# Altium PCB PCB1.PcbDoc
Units mil, origin at the board's own origin, x right, y up, seen from the top; angles counter-clockwise.
Board outline 4800 x 2800 mil, 2 copper layers (Top Layer, Bottom Layer); 12 components, 75 nets, 69 pads, 16 vias.
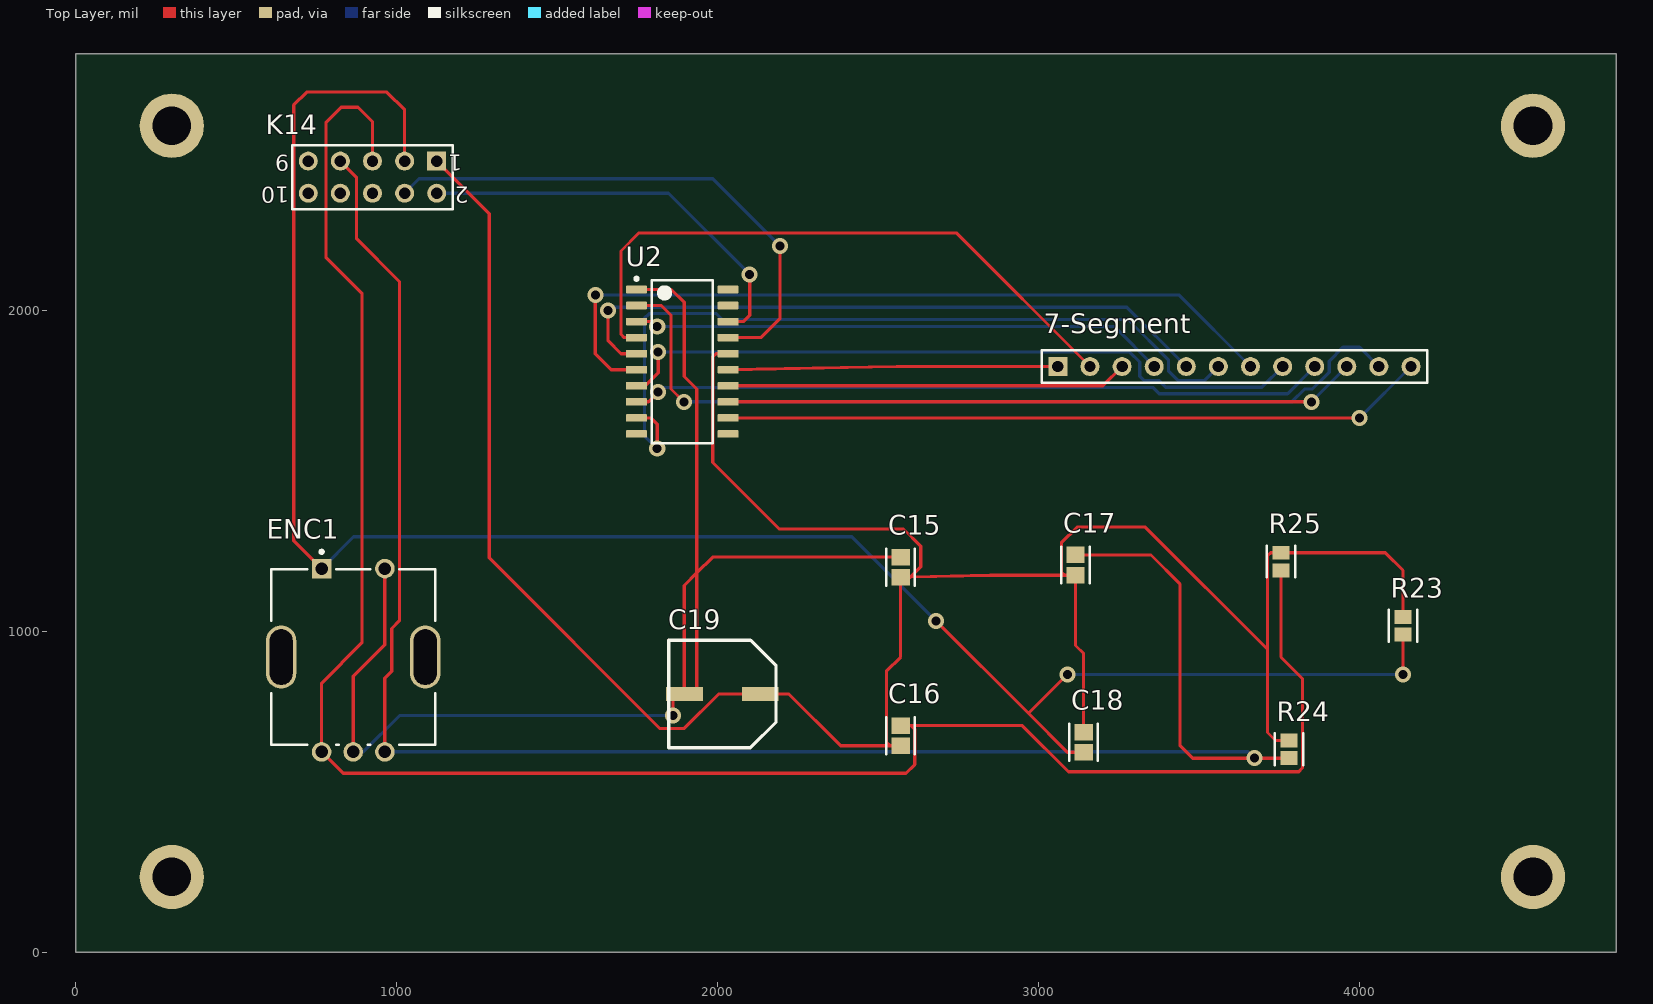
[diagram p0: Top Layer view]
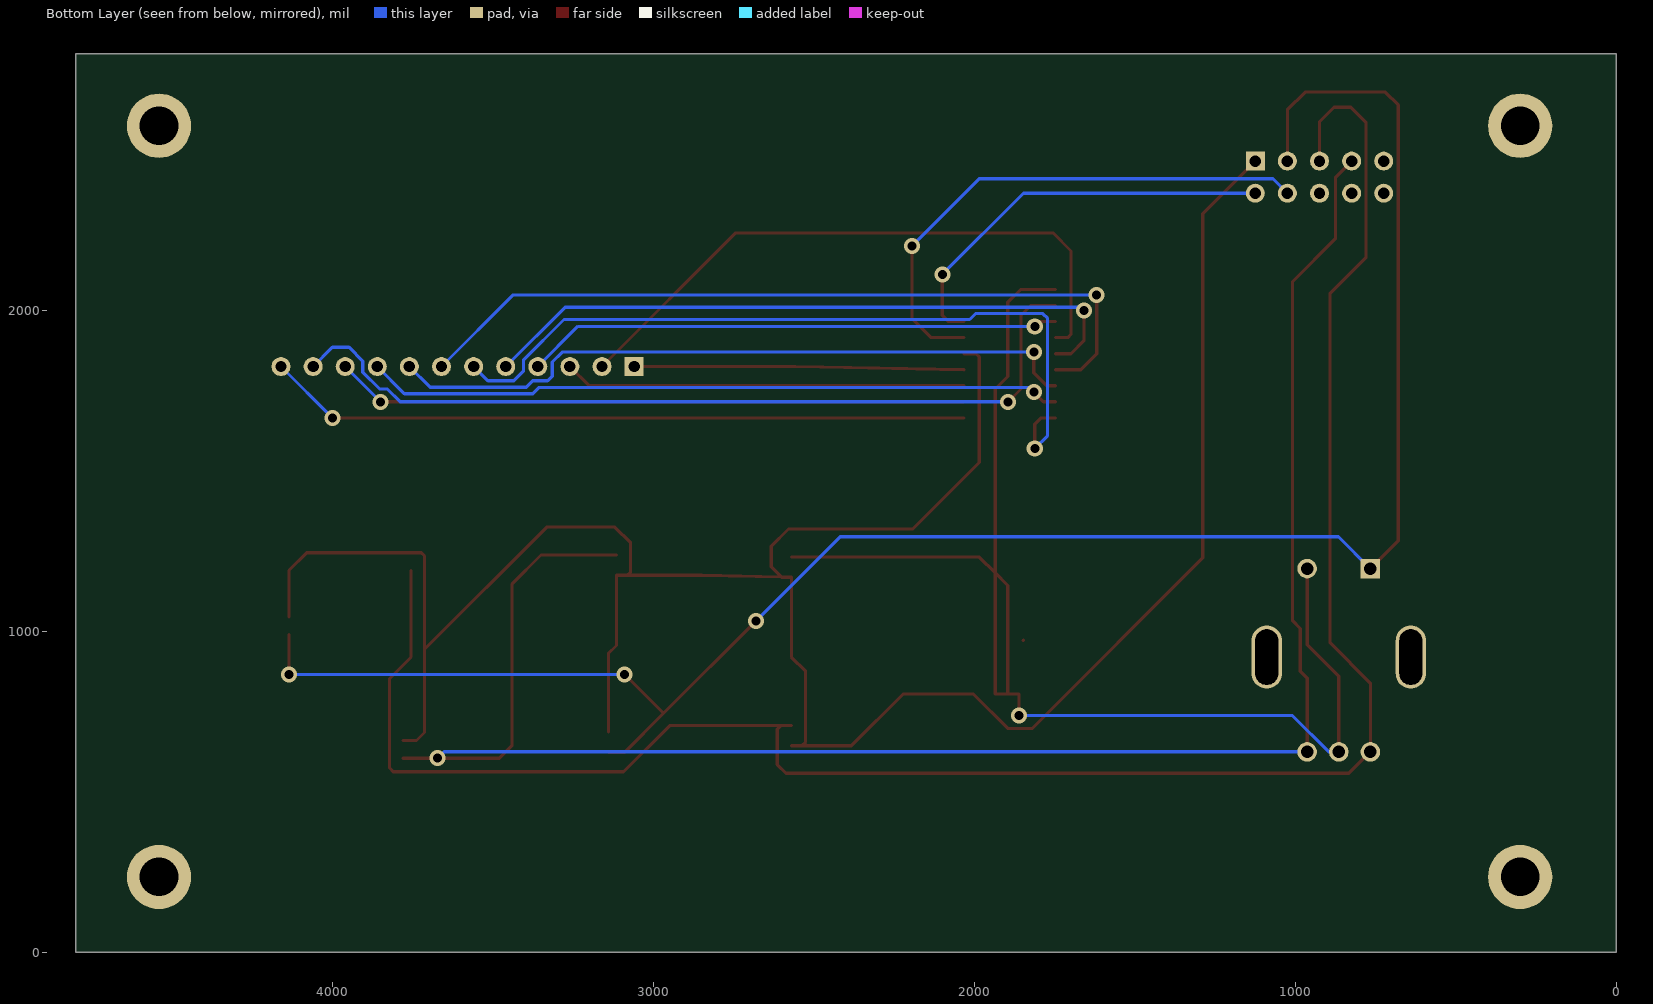
[diagram p1: Bottom Layer view, seen from below]
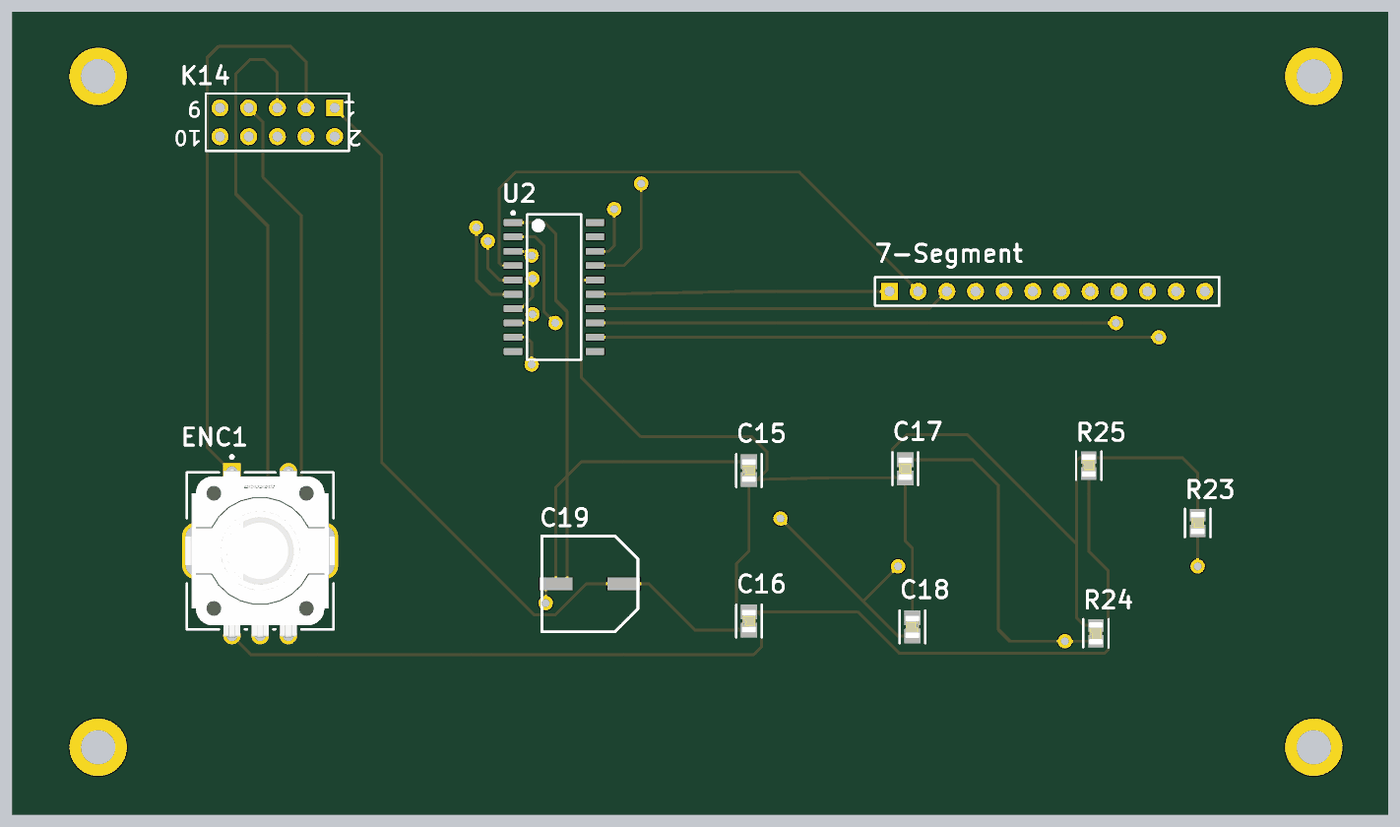
[diagram p2: 3D render of the assembled board from above, using the file's embedded part models]

## Layer stack, top to bottom
Top Solder: solder mask 0.4, Solder Resist, Dk 3.5
Top Layer: signal copper 1.4
Dielectric 1: dielectric 12.6, FR-4, Dk 4.8
Bottom Layer: signal copper 1.4
Bottom Solder: solder mask 0.4, Solder Resist, Dk 3.5

## Board outline
0,0 4800,0 4800,2800 0,2800

## Design rules (kind name [scope] priority, off if disabled: settings)
Clearance [All] p1: gap=10 ignorepadtopadclearanceinfootprint=FALSE
PolygonConnect [All] p1: connectstyle=Relief reliefconductorwidth=10 reliefentries=4 polygonreliefangle="90 Angle" airgapwidth=10
RoutingVias [All] p1: holewidth=28 width=50 viastyle="Through Hole" minholewidth=28 minwidth=50 maxholewidth=28 maxwidth=50
SolderMaskExpansion [All] p1: expansion=4 istentingtop=FALSE
Width [All] p1: maxlimit=10 minlimit=10 preferedwidth=10
30 further rules are at their usual default settings.

## Components (designator, comment, footprint, x,y, rotation, side; value= is the part's Value field where it differs from the comment)
7-Segment "header" HDR1X12 3060,1825 r0 top
C15 "100 nf" CC_0805_L 2570,1200 r90 top value="0.22 μF"
C16 "10 nf" CC_0805_L 2570,675 r90 top value="0.22 μF"
C17 "10 nf" CC_0805_L 3115,1206.53 r90 top value="0.22 μF"
C18 "10 nf" CC_0805_L 3140,655 r270 top value="0.22 μF"
C19 "100 uf" CE_D8_L10 2015,805 r0 top
ENC1 "" PEC11R_4220F_S0012 865,920 r0 top
K14 "Header 5X2" HDR2X5 1125,2465 r180 top
R23 "10k" CC_0805_m 4135,1017.41 r90 top
R24 "10k" CC_0805_m 3780,632.59 r90 top
R25 "10k" CC_0805_m 3755,1217.41 r90 top
U2 "TM1637" SOP_20_M 1890,1840 r0 top

## Footprints (in the part's own frame and the unit in brackets; to place one, negate y for a bottom-side part, rotate by r counter-clockwise, add the part's x,y. Pads: shape width x height; smd on the part's side, far side on the other; paste and mask are expansions set on the pad)
CC_0805_L [mil]
  rect 51.36x57.33 smd paste+0 mask+0: 1(-31.53,0) 2(31.53,0)
  silkscreen extent -57,-44 57,44, body extent -67,-39 67,39, height 10
CC_0805_m [mil]
  rect 43.49x53.39 smd paste+0 mask+0: 1(-27.59,0) 2(27.59,0)
  silkscreen extent -49,-44 49,44, body extent -53,-32 53,32, height 10
CE_D8_L10 [mm]
  rect 2.9x1.1 smd: 1(-3,0) 2(3,0)
  Top Layer lines w0.254: -4.259,4.25 -4.25,4.241
  silkscreen extent -4.26,-4.25 4.25,4.25
HDR1X12 [mm] "Connector; Header; 12 Position"
  rect 1.5x1.5 hole 0.9: 1(0,0)
  round 1.5 hole 0.9: 2(2.54,0) 3(5.08,0) 4(7.62,0) 5(10.16,0) 6(12.7,0) 7(15.24,0) 8(17.78,0) 9(20.32,0) 10(22.86,0) 11(25.4,0) 12(27.94,0)
  silkscreen extent -1.27,-1.27 29.21,1.27
HDR2X5 [mm] "Connector; Header; 5x2 Position"
  rect 1.5x1.5 hole 0.9: 1(0,0)
  round 1.5 hole 0.9: 2(0,2.54) 3(2.54,0) 4(2.54,2.54) 5(5.08,0) 6(5.08,2.54) 7(7.62,0) 8(7.62,2.54) 9(10.16,0) 10(10.16,2.54)
  silkscreen extent -1.27,-1.27 11.43,3.81
PEC11R_4220F_S0012 [mm]
  rect 1.55x1.55 hole 1 paste-1000 mask+0: 1(-2.5,7)
  round 1.55 hole 1 paste-1000 mask+0: 2(2.5,7) A(-2.5,-7.5) B(2.5,-7.5) C(0,-7.5)
  rrect100% 2.4x5 hole 4.4 slot 1.8 at 0 deg paste-1000 mask+0: 3(-5.7,0) 4(5.7,0)
  silkscreen extent -6.5,-6.95 6.5,8.45, body extent -7,-8.37 7,7.88, height 0.25
SOP_20_M [mm] "SOIC,20-Leads,Body 12.9x5.6mm,Pitch 1.27mm,IPC Medium Density"
  rrect17% 1.65x0.6 smd: 1(-3.625,5.715) 2(-3.625,4.445) 3(-3.625,3.175) 4(-3.625,1.905) 5(-3.625,0.635) 6(-3.625,-0.635) 7(-3.625,-1.905) 8(-3.625,-3.175) 9(-3.625,-4.445) 10(-3.625,-5.715) 11(3.625,-5.715) 12(3.625,-4.445) 13(3.625,-3.175) 14(3.625,-1.905) 15(3.625,-0.635) 16(3.625,0.635) 17(3.625,1.905) 18(3.625,3.175) 19(3.625,4.445) 20(3.625,5.715)
  silkscreen extent -3.75,-6.45 2.4,6.69, body extent -2.8,-6.45 2.8,6.45, height 2

## Part data
7-Segment: library part "Header 12", "Header, 12-Pin", LatestRevisionDate=17-Jul-2002, LatestRevisionNote="Re-released for DXP Platform.", Publisher="Altium Limited"
C15 C16 C17 C18: library part Capacitor_Ceramic, Capacitance="0.22 μF", Manufacturer=KEMET, Manufacturer Part Number=C0805C224K5RACTU, Package=C0805C-DN, Temperature="-55°C to +125°C", Temperature Characteristic=X7R, Temperature Coefficient=30ppm/°C, Temperature Range High=+125°C, Temperature Range Low=-55°C, Tolerance=0.1, Voltage Rating="50 V", Automotive=No, Category=Cap, ComponentLink2Description=Datasheet, ComponentLink2URL=https://content.kemet.com/datasheets/KEM_C1003_C0G_SMD.pdf, Device Class L1="Passive Components", Device Class L2=Capacitors, Device Class L3="Ceramic Capacitors", Digikey Description="CAP CER 0.22UF 50V X7R 0805", Height=0.88mm, Ipc Land Pattern Name=CAPC200125X78, Lead Free=Yes, Material=Ceramic, Mouser Description="CAP CER 0.22UF 50V X7R 0805", Octopart=https://octopart.com/c0805c224k5ractu-kemet-144670, RoHS=TRUE
C19: library part Capacitor_Electrolytic, Manufacturer=Panasonic, Max Operating Temperature="105 degC", Min Operating Temperature="-55 degC", Package Quantity=500, Voltage Rating="25 V", ComponentLink1Description="Manufacturer URL", ComponentLink1URL=http://www.panasonic.com/, ComponentLink2Description=Datasheet, ComponentLink2URL=http://industrial.panasonic.com/cdbs/www-data/pdf/RDE0000/ABA0000C1181.pdf, DatasheetVersion=03/2016, Height="10.2 mm", Lead Pitch="3.1 mm", Length="10.2 mm", Mount="Surface Mount", Mounting Technology="Surface Mount", PackageDescription="2-Pin Electrolytic Aluminum Capacitor, Body 8.3 x 8.3 mm", PackageReference=EEE-FK1E221P, Packaging="Tape and Reel", Pins=2, REACH SVHC="No SVHC", RoHSCompliant=true
ENC1: library part ROTARY_ENCODER, Current Rating=10mA, Manufacturer=Bourns, Manufacturer Part Number=PEC11R-4015F-N0024, Package=0, Temperature="-30°C to +70°C", Temperature Range High=+70°C, Temperature Range Low=-30°C, Voltage Rating Dc=5V, Automotive=No, Category=Enc, ComponentLink2Description=Datasheet, ComponentLink2URL=https://www.bourns.com/docs/product-datasheets/pec11r.pdf?sfvrsn=bb617cbf_7, Conn Orientation=Vertical, Detent=No, Device Class L1=Electromechanical, Device Class L2=Switches, Device Class L3=Encoders, Digikey Description="ROTARY ENCODER MECHANICAL 24PPR", Encoder Type=Incremental, Height=22.3mm, Lead Free=Yes, Mouser Description="Encoders 15mm SHAFT NO SWITCH", Number Of Circuits=1, Octopart=https://octopart.com/pec11r-4015f-n0024-bourns-26648251, Pulses Per Rev=24, RoHS=TRUE
K14: "Header, 5-Pin, Dual row", LatestRevisionDate=17-Jul-2002, LatestRevisionNote="Re-released for DXP Platform.", Publisher="Altium Limited"
R23 R24 R25: library part Resistor, Manufacturer="Vishay Dale", Part Number=CRCW08050000Z0EA
U2: "LED Drive Control Special Circuit", Package=Package, Availability="Not in stock", Check_prices=https://www.snapeda.com/parts/TM1637/Titan+Micro+Electronics/view-part/?ref=eda, MF="Titan Micro Electronics", MP=TM1637, Price=None, SnapEDA_Link=https://www.snapeda.com/parts/TM1637/Titan+Micro+Electronics/view-part/?ref=snap

## Free pads (board coordinates)
  round 200 hole 120: 2(300,235) 2(300,2575) 2(4540,235) 2(4540,2575)

## Via types
v1: diameter 50, hole 28, Top Layer to Bottom Layer, 16 vias

## Nets (pads, with @x,y where several pads share a name; then routed paths per layer and width w, separated by ;. In a path a pad name is that pad's centre, name@x,y a point inside that pad or via, vN(x,y) a via of type N, cw(c..) or ccw(c..) an arc to the next point about the centre after c; other vN are vias at no path point)
+5V: C15.1 C16.1 C17.1 C18.1 C19.2 K14.1 R23.2 R24.2 R25.2 U2.16 | length 7932.3
  Top Layer w10: K14.1 1289,2301 1289,1228.88 1820.64,697.23 1895.23,697.23 2003,805 C19.2 2221.47,805 2383,643.47 2537.53,643.47 ; U2.16 1995,1865 1985,1855 1985,1526 2192,1319 2579,1319 2633,1265 2633,1201.47 2600.72,1169.19 ; C16.1 2537.53,643.47 ; C18.1 3140,931 3115,956 C17.1 3081,1175 ; R24.2 3737.82,660.18 3713,685 3713,944 ; R23.2 4135,1190 4080,1245 R25.2 3723,1245 3713,1235 3713,944 ; 2537.53,643.47 2526,655 2526,876 2570,920 C15.1 ; C15.1 2600.72,1169.19 ; C15.1 2600,1168.47 2600.72,1169.19 ; 2600.72,1169.19 2849.53,1175 3081,1175 ; 3081,1175 3071,1185 3071,1276 3120,1325 3332,1325 3713,944
GND: C15.2 C19.1 ENC1.2 ENC1.C U2.1 | length 4245.7
  Top Layer w10: ENC1.C 865,860 963.43,958.43 ENC1.2 ; U2.1 1856,2065 1896,2025 1896,1794 1935,1755 1935,1182 ; v1(1861,738) 1861,805 C19.1@1896,805 ; C15.2 1984.53,1231.53 1935,1182 ; C19.1@1896,805 1896,1143 1935,1182 ; C19.1@1896,805 C19.1 1935,805 1935,1182
  Bottom Layer w10: ENC1.C 896.72,624.72 1010,738 v1(1861,738)
Net7-Segment_1: 7-Segment.1 U2.15 | length 1027.4
  Top Layer w10: U2.15 2557,1825 7-Segment.1
Net7-Segment_2: 7-Segment.2 U2.4 | length 1969.1
  Top Layer w10: U2.4 1709,1915 1699,1925 1699,2185 1755.25,2241.25 2743.75,2241.25 7-Segment.2
Net7-Segment_3: 7-Segment.3 U2.14 | length 1252.1
  Top Layer w10: U2.14 3200,1765 7-Segment.3
Net7-Segment_4: 7-Segment.4 U2.3 | length 1670.7
  Top Layer w10: U2.3 1797,1965 v1(1812,1950)
  Bottom Layer w10: v1(1812,1950) 3235,1950 7-Segment.4
Net7-Segment_5: 7-Segment.5 U2.5 | length 2081.6
  Top Layer w10: v1(1659,2000) 1659,1905 1699,1865 U2.5
  Bottom Layer w10: v1(1659,2000) 1669,2010 3275,2010 7-Segment.5
Net7-Segment_6: 7-Segment.6 U2.9 | length 2489.2
  Top Layer w10: U2.9 1792,1665 1812,1645 v1(1812,1570)
  Bottom Layer w10: v1(1812,1570) 1772,1610 1772,1975 1787,1990 1996.55,1990 2015.05,1971.5 3278.5,1971.5 3405,1845 3405,1810.47 3435,1780.47 3515.47,1780.47 7-Segment.6
Net7-Segment_7: 7-Segment.7 U2.6 | length 2465.4
  Top Layer w10: v1(1619,2048) 1619,1865 1669,1815 U2.6
  Bottom Layer w10: v1(1619,2048) 3437,2048 7-Segment.7
Net7-Segment_8: 7-Segment.8 U2.7 | length 2192.2
  Top Layer w10: U2.7 1775,1765 1815,1805 v1(1815,1870)
  Bottom Layer w10: v1(1815,1870) 3284,1870 3315,1839 3315,1795 3329.53,1780.47 3375.47,1780.47 3395.47,1760.47 3695.47,1760.47 7-Segment.8
Net7-Segment_9: 7-Segment.9 U2.8 | length 2174.5
  Top Layer w10: U2.8 1785,1715 v1(1815,1745)
  Bottom Layer w10: v1(1815,1745) 1830,1760 3355.94,1760 3375.47,1740.47 3775.47,1740.47 7-Segment.9
Net7-Segment_10: 7-Segment.10 U2.13 | length 1972.8
  Top Layer w10: U2.13 v1(3850,1715)
  Bottom Layer w10: v1(3850,1715) 7-Segment.10
Net7-Segment_11: 7-Segment.11 U2.2 | length 2687.5
  Top Layer w10: U2.2 1825,2015 1855,1985 1855,1755 v1(1895,1715)
  Bottom Layer w10: v1(1895,1715) 3789,1715 3829,1755 3853,1755 3905,1807 3905,1842 3948,1885 4000,1885 7-Segment.11
Net7-Segment_12: 7-Segment.12 U2.12 | length 2193.6
  Top Layer w10: U2.12 v1(4000,1665)
  Bottom Layer w10: v1(4000,1665) 7-Segment.12
NetB1_3: 
NetB1_4: 
NetB2_1: 
NetB2_3: 
NetC6_2: 
NetC7_1: 
NetC11_1: 
NetC12_1: 
NetC13_1: 
NetC14_1: 
NetC14_2: 
NetC16_2: C16.2 ENC1.A K14.5 R25.1 | length 6336.7
  Top Layer w10: K14.5 925,2588 880,2633 828,2633 780,2585 780,2165 892,2053 892,964 766.57,838.57 ENC1.A 833.3,558 2587,558 2614,585 2614,695 2602.47,706.53 ; C16.2 2602.47,706.53 ; R25.1 3755,920 3822,853 3822,575 3810,563 3093,563 2949.47,706.53 2602.47,706.53
NetC17_2: C17.2 ENC1.B K14.7 R24.1 | length 5874.4
  Top Layer w10: K14.7 875,2415 875,2224 1009,2090 1009,1033 985,1009 985,876 963.43,854.43 ENC1.B ; C17.2 3349.95,1238.05 3440,1148 3440,645 3480,605 v1(3672,605) R24.1
  Bottom Layer w10: ENC1.B 963.43,625 3652,625 v1(3672,605)
NetC18_2: C18.2 ENC1.1 K14.3 R23.1 | length 6058
  Top Layer w10: ENC1.1 680,1282.16 680,2640 720,2680 970,2680 1025,2625 K14.3 ; v1(2680,1033) 2968.5,744.5 ; v1(3090,866) 2968.5,744.5 ; C18.2 3089.53,623.47 2968.5,744.5 ; v1(4135,866) R23.1
  Bottom Layer w10: ENC1.1 865.98,1295 2418,1295 v1(2680,1033) ; v1(3090,866) v1(4135,866)
NetD1_2: 
NetD2_1: 
NetIC2A_6: 
NetIC2A_7: 
NetIC2B_1: 
NetIC2B_2: 
NetK2_1: 
NetK4_1: 
NetK4_2: 
NetK4_3: 
NetK5_1: 
NetK5_2: 
NetK6_2: 
NetK6_3: 
NetK7_2: 
NetK8_1: 
NetK8_2: 
NetK9_1: 
NetK9_2: 
NetK9_3: 
NetK9_4: 
NetK9_5: 
NetK10_1: 
NetK10_2: 
NetK11_1: 
NetK11_4: 
NetK12_2: 
NetK12_3: 
NetK12_4: 
NetK12_5: 
NetK12_7: 
NetK12_9: 
NetK13_2: 
NetK14_2: K14.2 U2.18 | length 1282.4
  Top Layer w10: U2.18 2080,1965 2100,1985 v1(2100,2112)
  Bottom Layer w10: K14.2 1847,2365 v1(2100,2112)
NetK14_4: K14.4 U2.17 | length 1686.9
  Top Layer w10: U2.17 2135,1915 2194,1974 v1(2194,2201)
  Bottom Layer w10: K14.4 1070,2410 1985,2410 v1(2194,2201)
NetL2_1: 
NetL2_2: 
NetR7_1: 
NetR7_2: 
NetR11_2: 
NetR17_1: 
NetR18_1: 
NetR18_2: 
NetR19_1: 
NetR19_2: 
PD0: 
VIN: 
pads on no net: ENC1.3 ENC1.4 K14.6 K14.8 K14.9 K14.10 U2.10 U2.11 U2.19 U2.20

## Text inside footprints (layer, text, board x,y; h text height)
K14: Top Overlay "10" at 665,2385 h50 r180; Top Overlay "9" at 665,2485 h50 r180; Top Overlay "1" at 1205,2485 h50 r180; Top Overlay "2" at 1225,2385 h50 r180